# Altium PCB comparator_mezzanine.PcbDoc
Units mil, origin at the board's own origin, x right, y up, seen from the top; angles counter-clockwise.
Board outline 2200 x 2200 mil, 4 copper layers (Top Layer, Signal Layer 1, Signal Layer 2, Bottom Layer), stack 30.634 mil thick; 29 components, 55 nets, 244 pads, 27 vias.
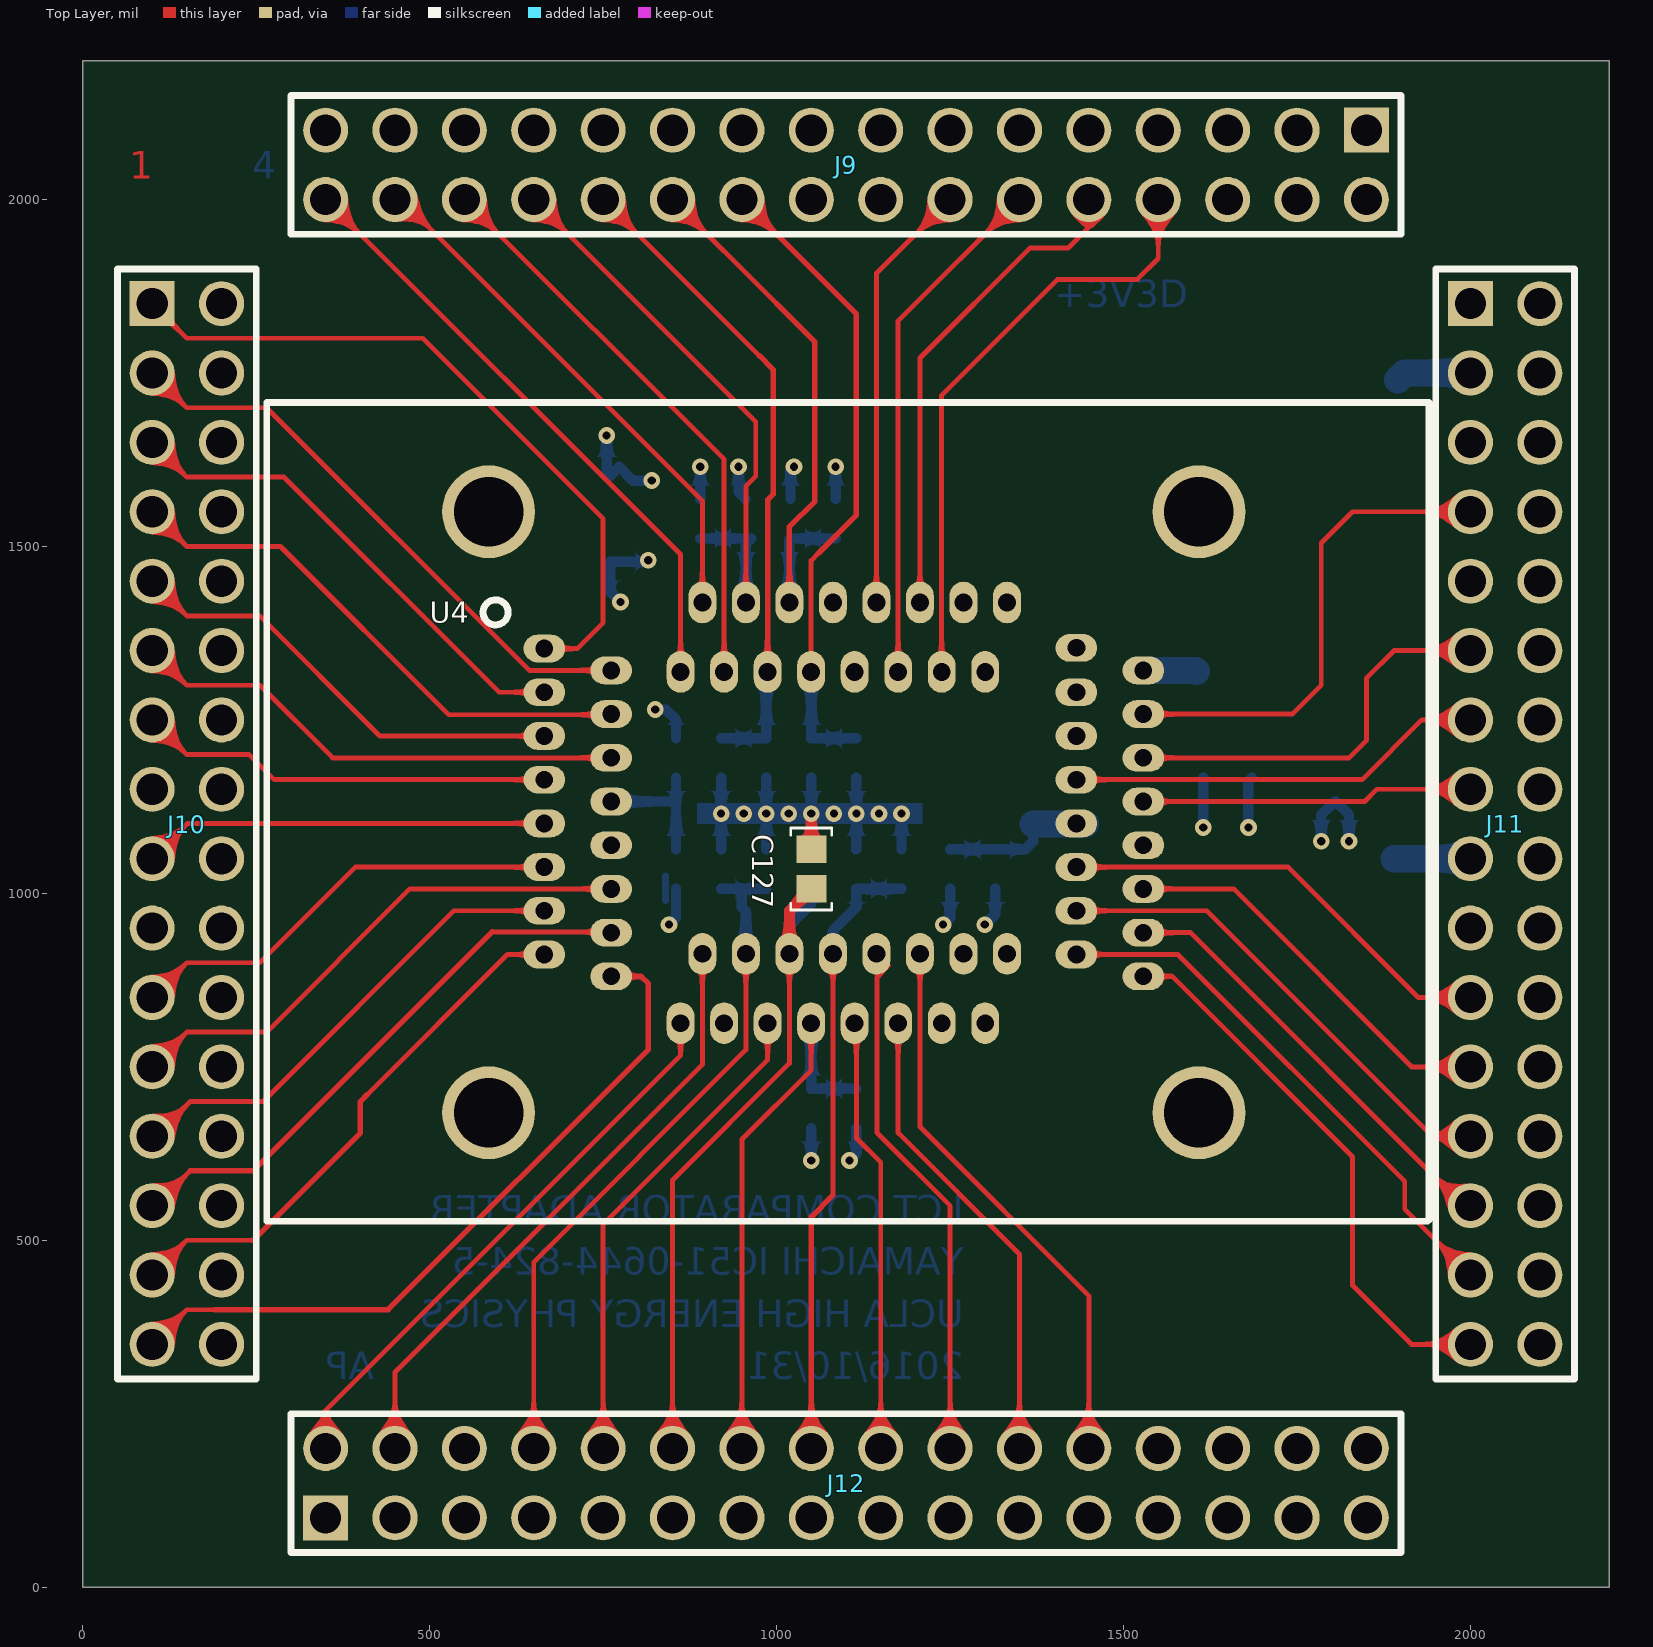
[diagram p0: Top Layer view]
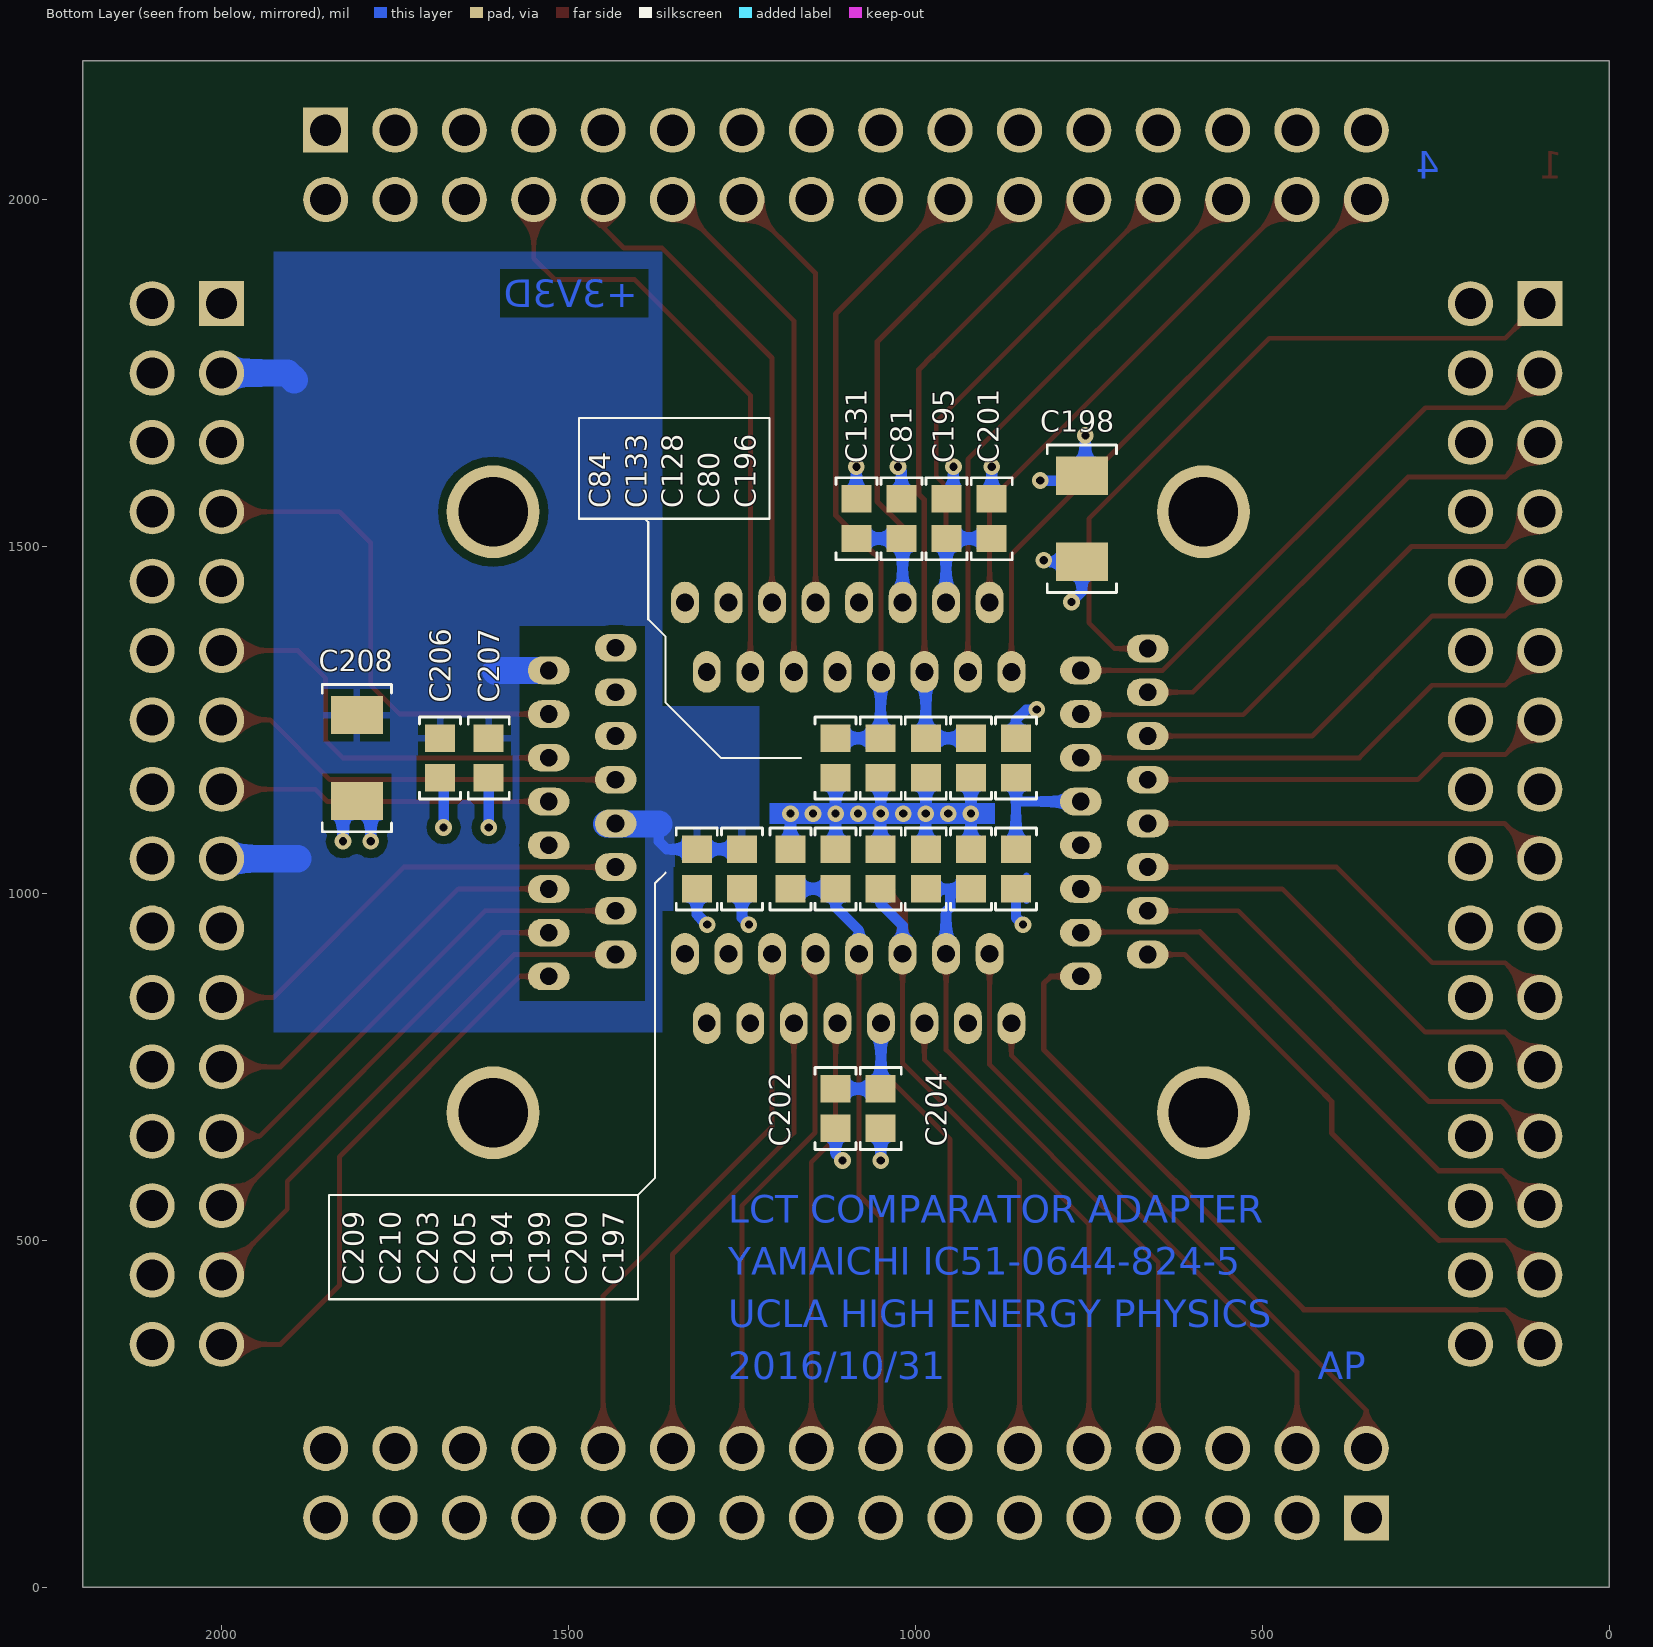
[diagram p1: Bottom Layer view, seen from below]
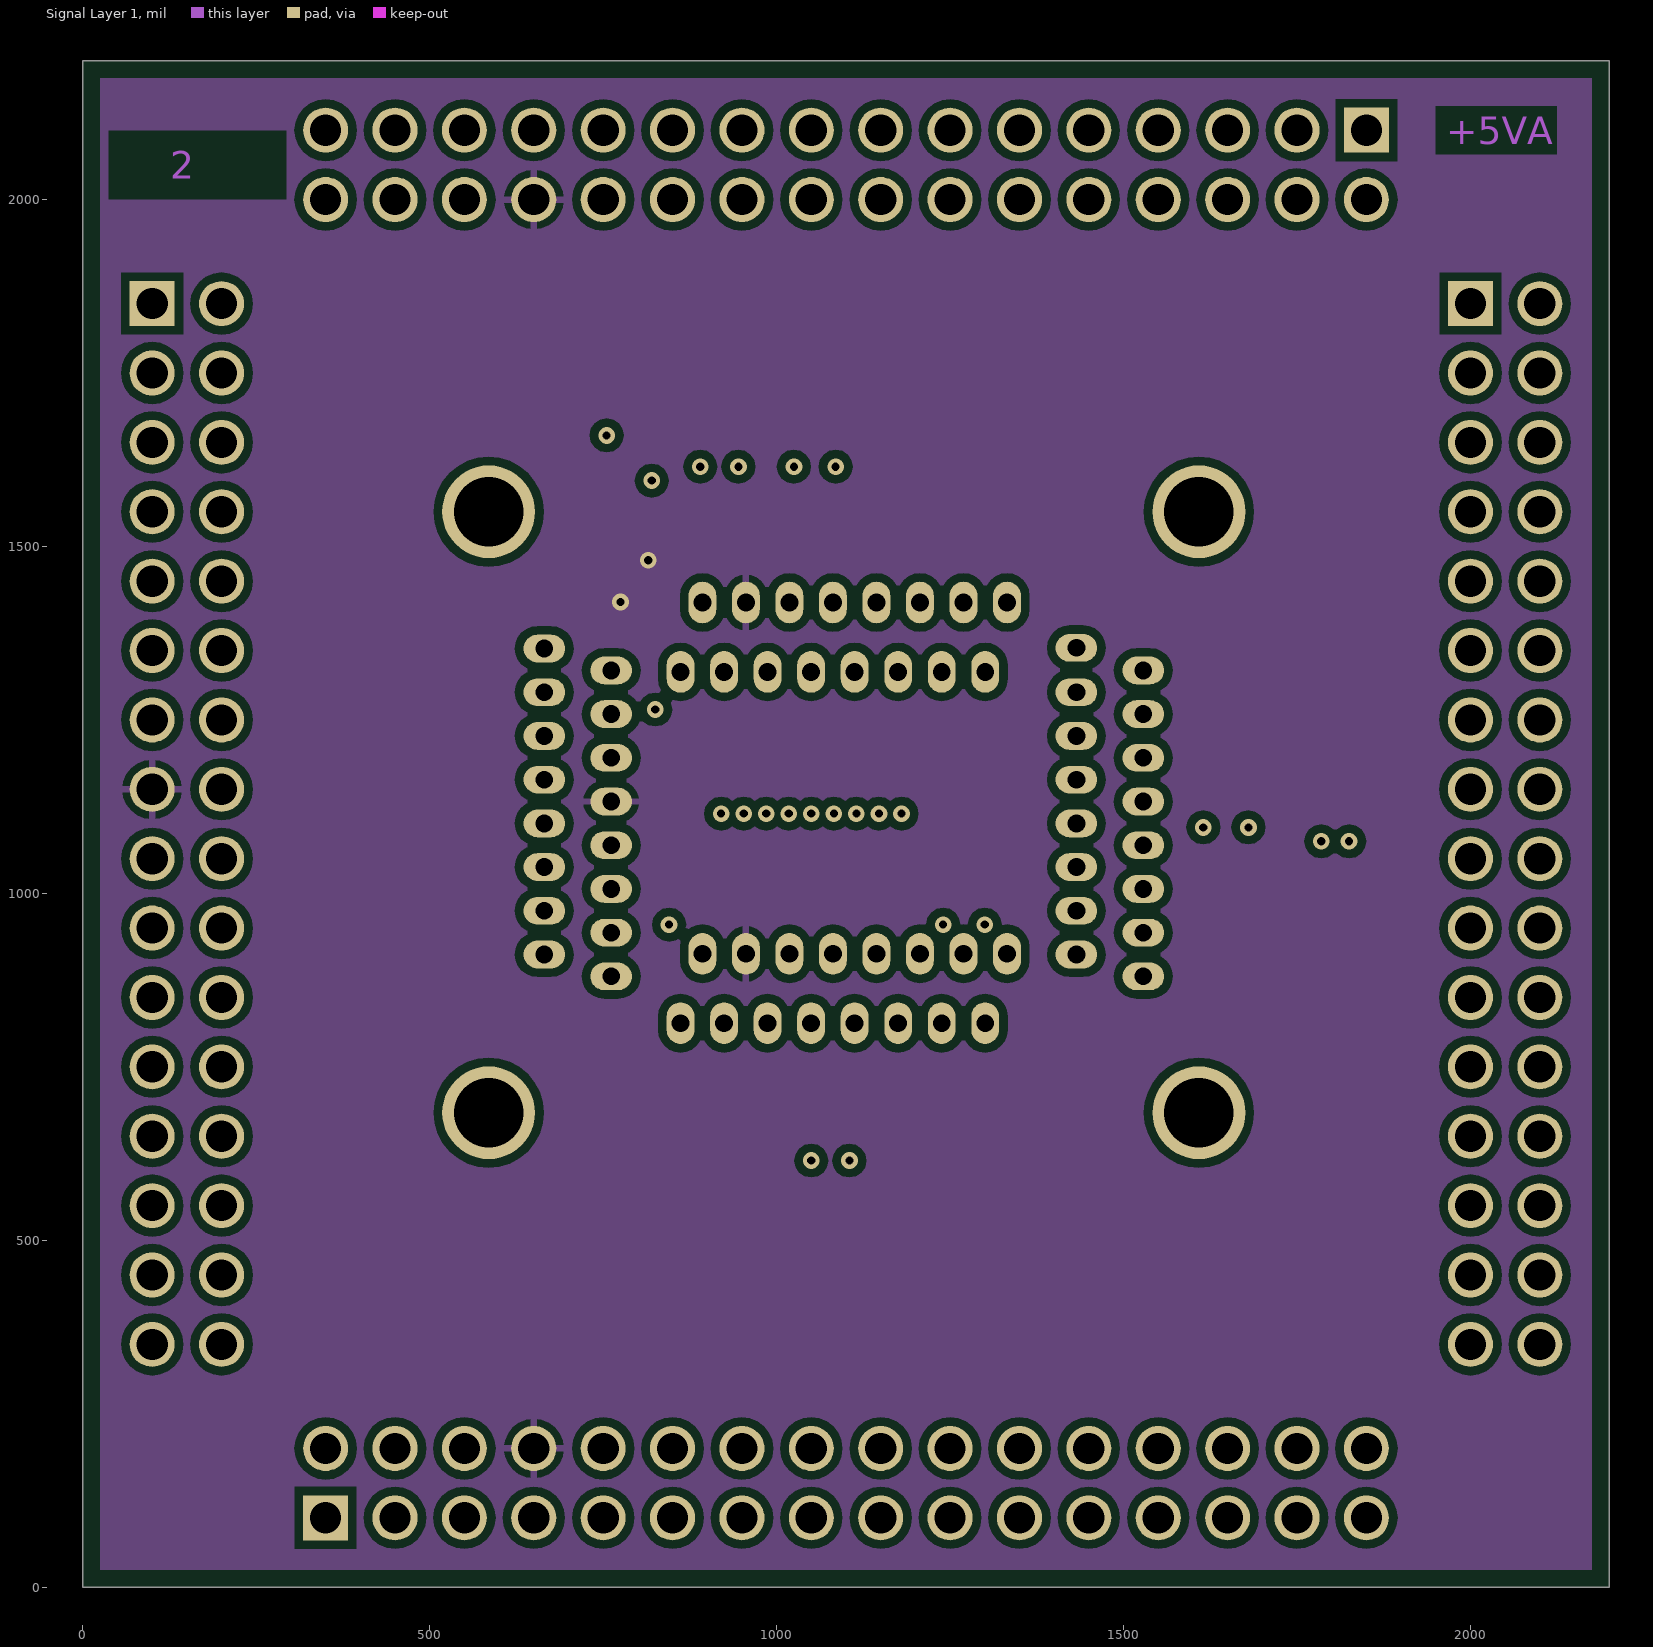
[diagram p2: Signal Layer 1]
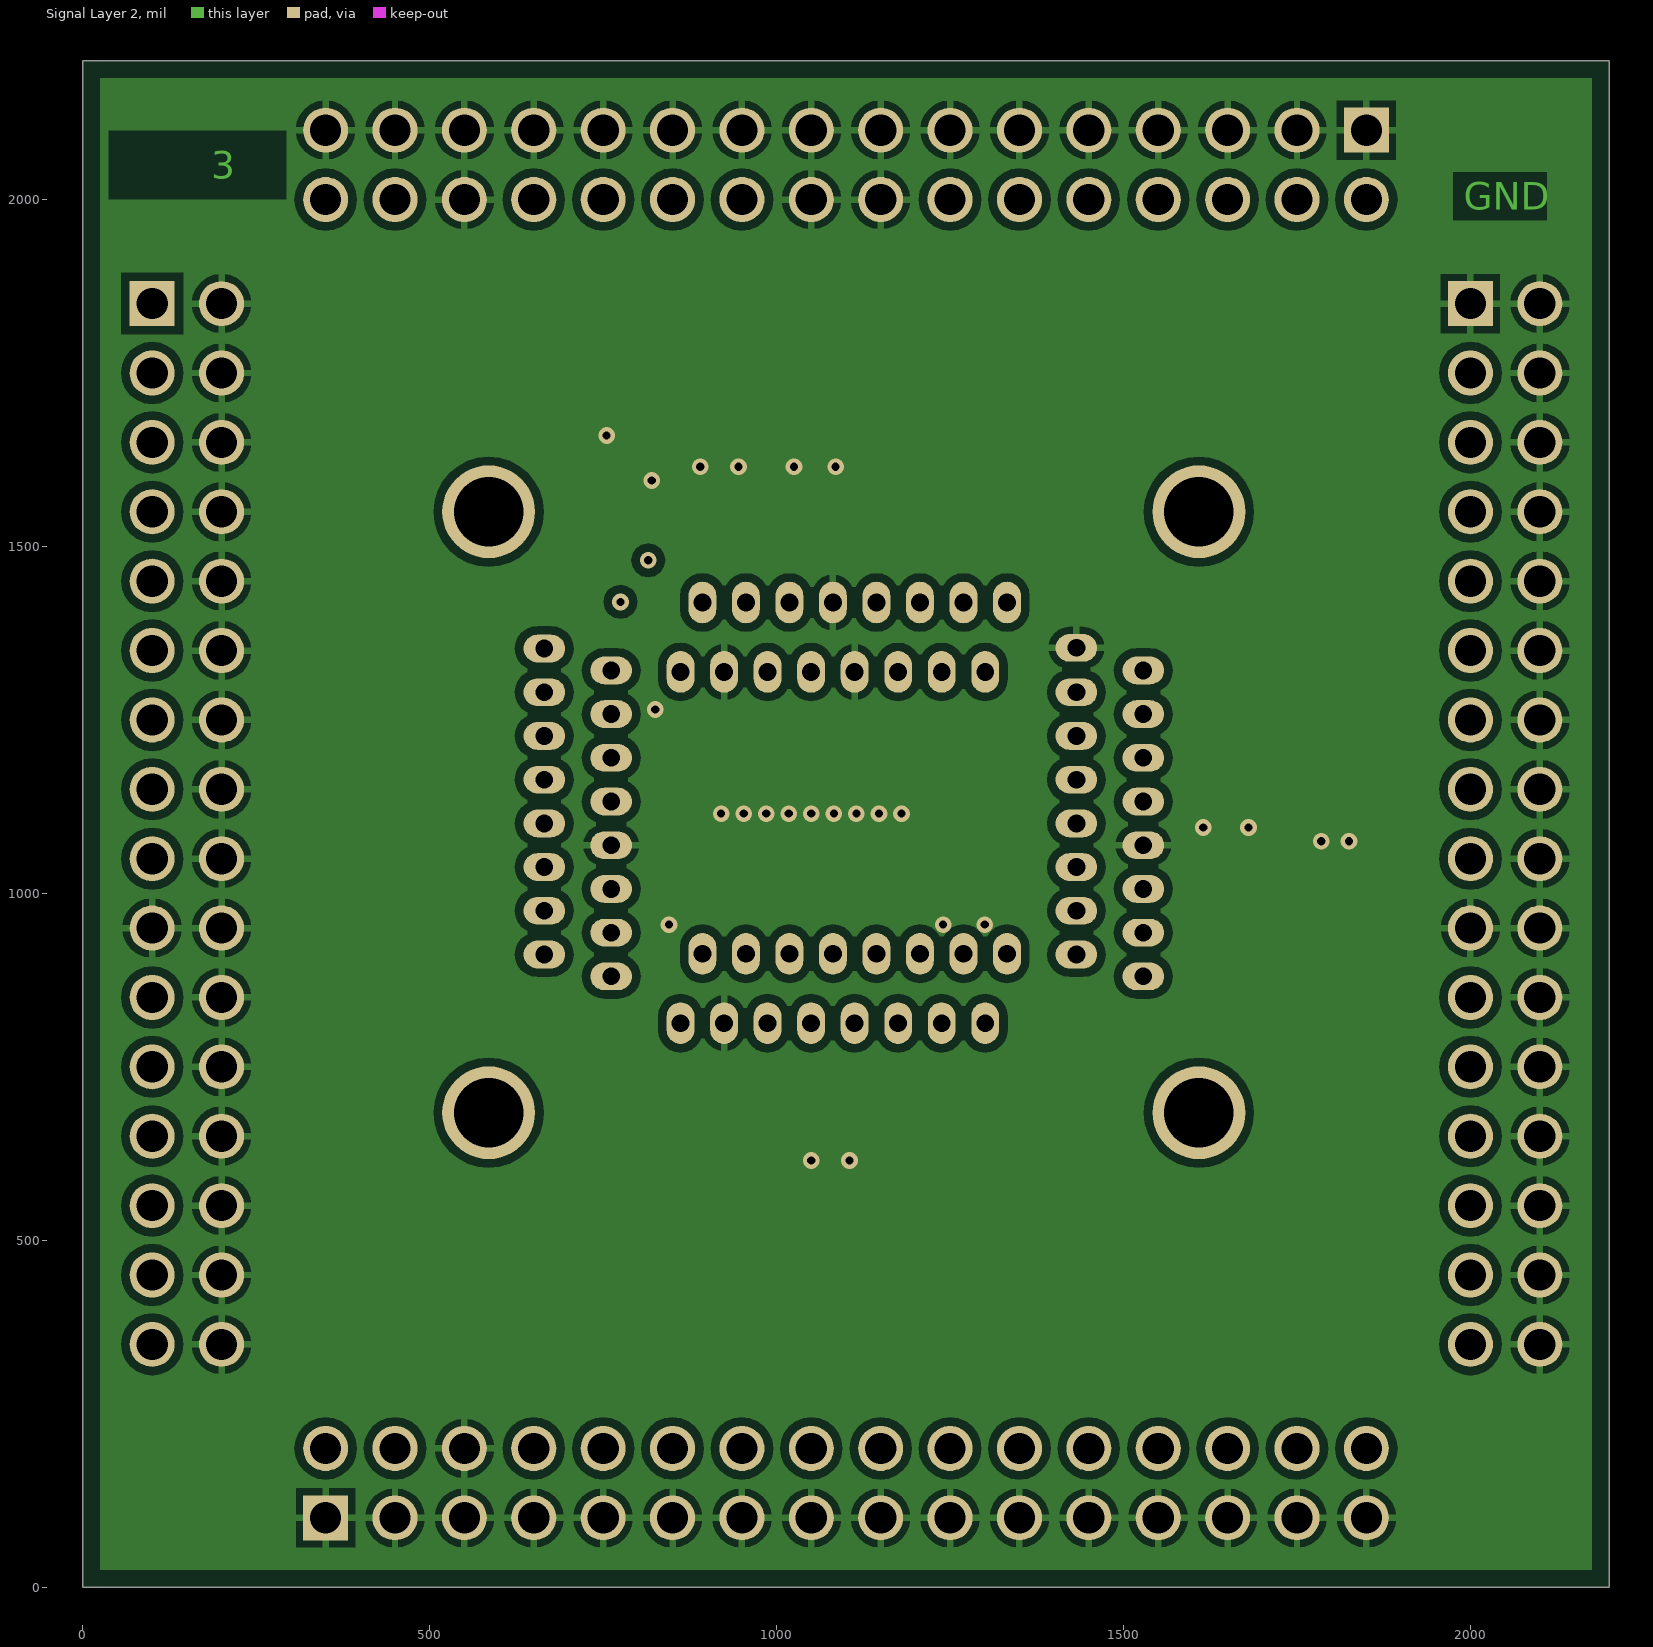
[diagram p3: Signal Layer 2]
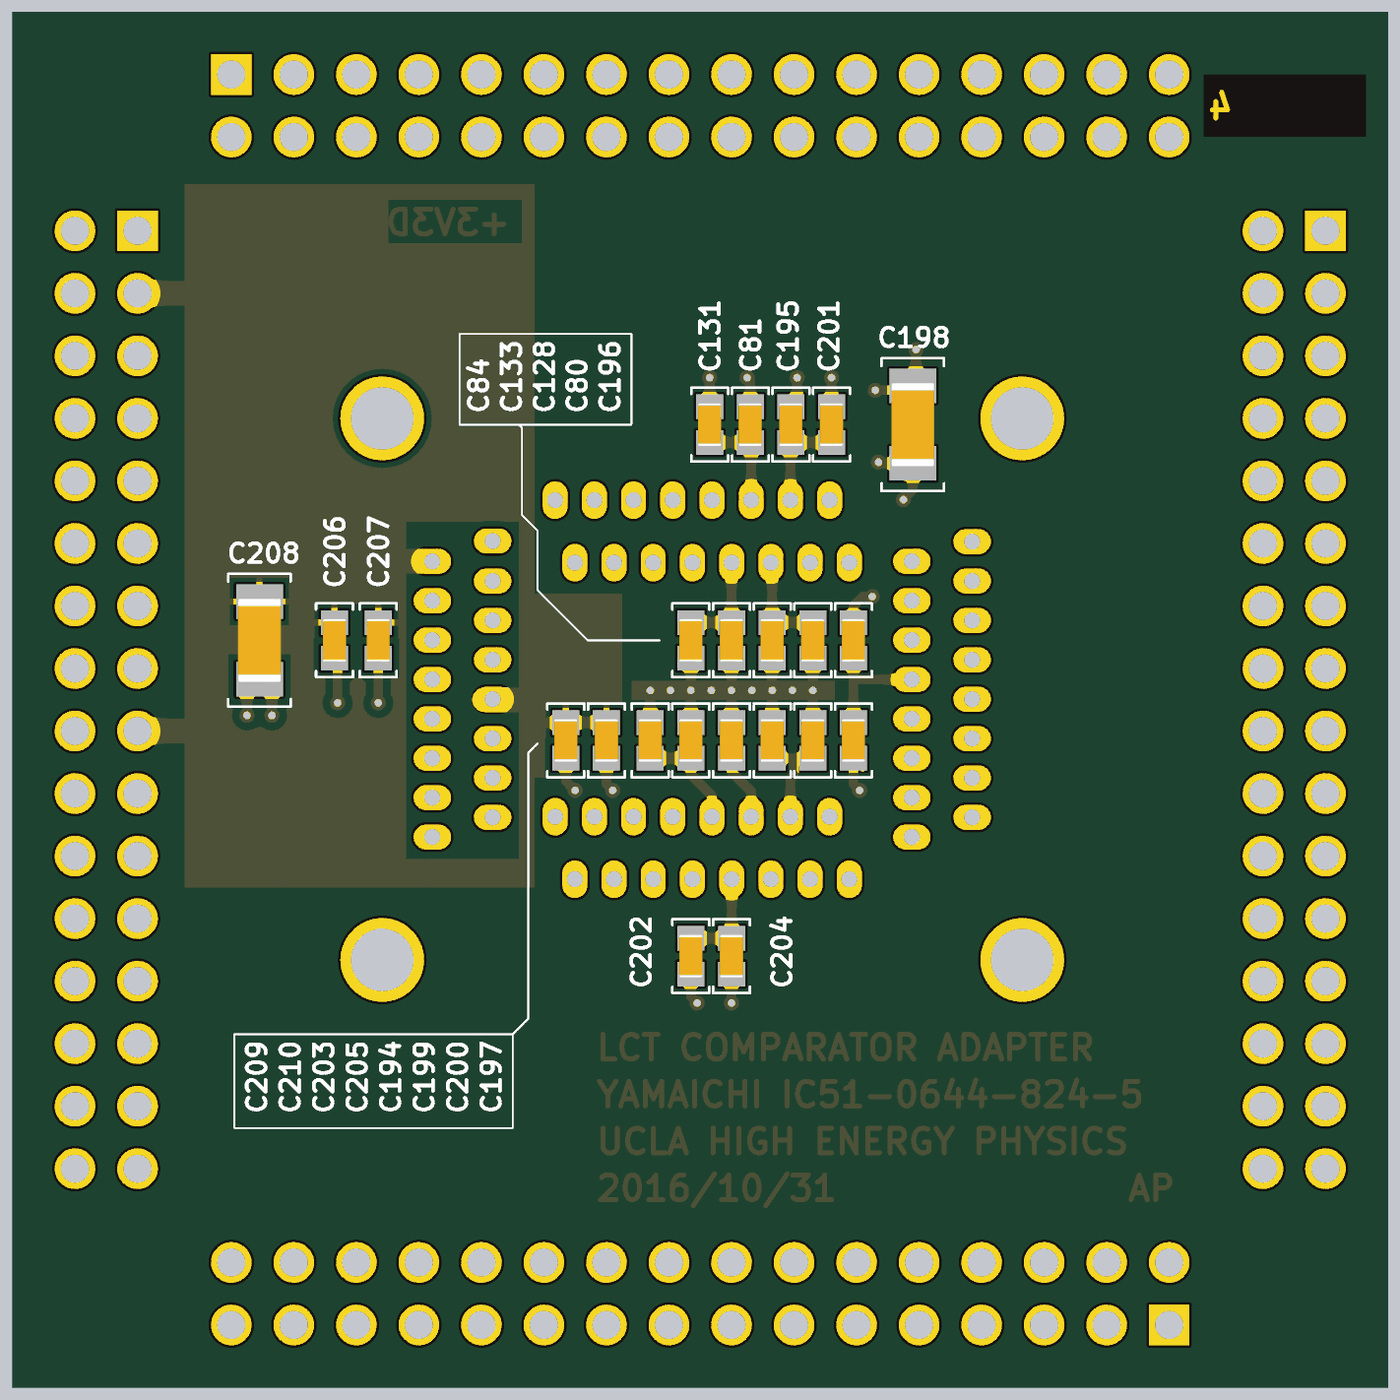
[diagram p4: 3D render of the assembled board from below, using the file's embedded part models]

## Layer stack, top to bottom
Top Solder: solder mask 0.4, Solder Resist, Dk 3.5
Top Layer: signal copper 1.4
Dielectric 1: core 10, FR-4, Dk 4.2
Signal Layer 1: signal copper 1.417
Dielectric 3: prepreg 5, Dk 4.2
Signal Layer 2: signal copper 1.417
Dielectric 2: core 10, Dk 4.2
Bottom Layer: signal copper 1.4
Bottom Solder: solder mask 0.4, Solder Resist, Dk 3.5

## Board outline
0,0 2200,0 2200,2200 0,2200

## Design rules (kind name [scope] priority, off if disabled: settings)
Clearance [All] p1: gap=7 except(12: Arc-Poly Track-Poly SMDPad-Poly THPad-Poly Via-Poly Fill-Poly Poly-Poly)
MinimumAnnularRing [All] p1: minimumring=6
MinimumSolderMaskSliver [All] p1: minsoldermaskwidth=9.45
PolygonConnect ViaConnect [IsVia] p1: connectstyle=Direct reliefconductorwidth=10 reliefentries=4 polygonreliefangle="90 Angle" airgapwidth=10
PolygonConnect [All] p2: connectstyle=Relief reliefconductorwidth=10 reliefentries=4 polygonreliefangle="90 Angle" airgapwidth=10
RoutingVias [All] p1: holewidth=10 width=20 viastyle="Through Hole" minholewidth=10 minwidth=20 maxholewidth=10 maxwidth=20
SilkToSolderMaskClearance [IsPad] p1: minsilkscreentomaskgap=5.91 clearancetoexposedcopper=TRUE
SolderMaskExpansion [All] p1: expansion=4
Width [All] p1: maxlimit=39.37 minlimit=7 preferedwidth=10 midlayer1_minwidth=10 midlayer2_minwidth=10 minimp=50.000000 maximp=50.000000 favimp=50.000000
28 further rules are at their usual default settings.

## Components (designator, comment, footprint, x,y, rotation, side; value= is the part's Value field where it differs from the comment)
C80 "1uF" C0603 920,1195 r90 bottom
C81 "1uF" C0603 1020,1540 r270 bottom
C84 "1uF" C0603 1115,1195 r90 bottom
C127 "1uF" C0603 1050,1035 r270 top
C128 "0.1uF" C0603 985,1195 r90 bottom
C131 "0.1uF" C0603 1085,1540 r270 bottom
C133 "0.1uF" C0603 1050,1195 r90 bottom
C194 "0.1uF" C0603 1050,1035 r270 bottom
C195 "1uF" C0603 955,1540 r270 bottom
C196 "1uF" C0603 855,1195 r270 bottom
C197 "1uF" C0603 855,1035 r90 bottom
C198 "10uF" c1206 760,1540 r90 bottom
C199 "0.1uF" C0603 985,1035 r270 bottom
C200 "0.1uF" C0603 920,1035 r270 bottom
C201 "0.1uF" C0603 890,1540 r270 bottom
C202 "1uF" C0603 1115,690 r90 bottom
C203 "1uF" C0603 1180,1035 r270 bottom
C204 "0.1uF" C0603 1050,690 r90 bottom
C205 "0.1uF" C0603 1115,1035 r270 bottom
C206 "1uF" C0603 1685,1195 r90 bottom
C207 "1uF" C0603 1615,1195 r90 bottom
C208 "10uF" c1206 1805,1195 r270 bottom
C209 "0.1uF" C0603 1315,1035 r90 bottom
C210 "0.1uF" C0603 1250,1035 r90 bottom
J9 "HEADER 16x02" "HEADER 16X02" 1850,2100 r270 top
J10 "HEADER 16x02" "HEADER 16X02" 100,1850 r0 top
J11 "HEADER 16x02" "HEADER 16X02" 2000,1850 r0 top
J12 "HEADER 16x02" "HEADER 16X02" 350,100 r90 top
U4 "UCLA/LCT_COMP" FPQ-64-0.8-10 585,1550 r0 top locked

## Footprints (in the part's own frame and the unit in brackets; to place one, negate y for a bottom-side part, rotate by r counter-clockwise, add the part's x,y. Pads: shape width x height; smd on the part's side, far side on the other; paste and mask are expansions set on the pad)
C0603 [mm] "Chip Capacitor, 2-Leads, Body 1.60x0.85mm, IPC Low Density"
  rect 1x1.1 smd: 1(-0.725,0) 2(0.725,0)
  silkscreen extent -1.5,-0.75 1.5,0.75, body extent -0.87,-0.48 0.87,0.48, height 0.55
c1206 [mm] "Chip Capacitor, 2-Leads, Body 3.27x1.60mm, IPC Low Density"
  rect 1.4x1.9 smd: 1(-1.575,0) 2(1.575,0)
  silkscreen extent -2.7,-1.27 2.7,1.27, body extent -1.7,-0.87 1.7,0.87, height 1.75
FPQ-64-0.8-10 [mil] "TQFP-64 Chip Socket"
  oval 60x40 hole 25.59: 1(80.12,-197.14) 2(176.57,-228.64) 3(80.12,-260.13) 4(176.57,-291.63) 5(80.12,-323.13) 6(176.57,-354.62) 7(80.12,-386.12) 8(176.57,-417.61) 9(80.12,-449.11) 10(176.57,-480.61) 11(80.12,-512.1) 12(176.57,-543.6) 13(80.12,-575.09) 14(176.57,-606.59) 15(80.12,-638.09) 16(176.57,-669.58) 33(943.5,-669.58) 34(847.05,-638.09) 35(943.5,-606.59) 36(847.05,-575.09) 37(943.5,-543.6) 38(847.05,-512.1) 39(943.5,-480.61) 40(847.05,-449.11) 41(943.5,-417.61) 42(847.05,-386.12) 43(943.5,-354.62) 44(847.05,-323.13) 45(943.5,-291.63) 46(847.05,-260.13) 47(943.5,-228.64) 48(847.05,-196.14)
  oval 40x60 hole 25.59: 17(276.57,-737.09) 18(308.07,-637.09) 19(339.29,-737.09) 20(370.78,-637.09) 21(402,-737.09) 22(433.49,-637.09) 23(464.71,-737.09) 24(496.2,-637.09) 25(527.42,-737.09) 26(558.91,-637.09) 27(590.13,-737.09) 28(621.62,-637.09) 29(652.84,-737.09) 30(684.34,-637.09) 31(715.55,-737.09) 32(747.05,-637.09) 49(747.05,-130.79) 50(715.55,-230.79) 51(684.34,-130.79) 52(652.84,-230.79) 53(621.62,-130.79) 54(590.13,-230.79) 55(558.91,-130.79) 56(527.42,-230.79) 57(496.2,-130.79) 58(464.71,-230.79) 59(433.49,-130.79) 60(402,-230.79) 61(370.78,-130.79) 62(339.29,-230.79) 63(308.07,-130.79) 64(276.57,-230.79)
  round 133.86 hole 100: ""(0,-866.14) ""(0,0) ""(1023.62,-866.14) ""(1023.62,0)
  silkscreen extent -320,-1023 1355,157
"HEADER 16X02" [mil]
  rect 65x65 hole 45: 1(0,0)
  round 65 hole 45: 2(100,0) 3(0,-100) 4(100,-100) 5(0,-200) 6(100,-200) 7(0,-300) 8(100,-300) 9(0,-400) 10(100,-400) 11(0,-500) 12(100,-500) 13(0,-600) 14(100,-600) 15(0,-700) 16(100,-700) 17(0,-800) 18(100,-800) 19(0,-900) 20(100,-900) 21(0,-1000) 22(100,-1000) 23(0,-1100) 24(100,-1100) 25(0,-1200) 26(100,-1200) 27(0,-1300) 28(100,-1300) 29(0,-1400) 30(100,-1400) 31(0,-1500) 32(100,-1500)
  silkscreen extent -50,-1550 150,50

## Part data
C80 C81 C84 C127 C195 C196 C197 C202 C203 C206 C207: library part Murata/GRM188R61E105KA12D, "CAP2, CER, 1.0uF, 10%, 25V, 0603"
C128 C131 C133 C194 C199 C200 C201 C204 C205 C209 C210: library part CAP/06035C104KAT2A, "CAP-CER, 2, 0.1uF, 10%, 50V, 0603, X7R"
C198 C208: library part CAP/GMK316F106ZL-T, "CAP-CER, 2, 10uF, 10%, 35V, 1206"
U4: "UCLA LCT Comparator"

## Via types
v1: diameter 24, hole 11.81, Top Layer to Bottom Layer, tented both sides, 27 vias

## Nets (pads, with @x,y where several pads share a name; then routed paths per layer and width w, separated by ;. In a path a pad name is that pad's centre, name@x,y a point inside that pad or via, vN(x,y) a via of type N, cw(c..) or ccw(c..) an arc to the next point about the centre after c; other vN are vias at no path point)
+3V3D: C206.2 C207.2 C208.1 C209.2 C210.2 J11.3 J11.17 U4.40 U4.47 | length 516.6
  Bottom Layer w15: C210.2 C209.2 1358.54,1063.54 1370,1075 1370,1085 1377.5,1092.5 ; J11.3@1995,1750 J11.3
  Bottom Layer w39.37: 1370,1100 U4.40@1445,1100 ; U4.47 1603.64,1321.36 1605,1320 ; 1890,1050 J11.17 ; 1895,1740 1905,1750 J11.3@1995,1750
+5VA: C195.2 C196.2 C197.2 C198.1 C199.2 C200.2 C201.2 J9.26 J10.15 J12.8 U4.8 U4.20 U4.61 | length 2208.2
  Top Layer w7: J12.8 650,468.57 955.78,774.35 U4.20 ; J9.26 970,1680 970,1601.01 955.78,1586.79 U4.61
  Bottom Layer w15: U4.8 852.61,1132.39 855,1130 ; v1(775,1420) 760,1435 C198.1 812.99,1477.99 v1(815,1480) ; C197.2 855,1130 ; C196.2 855,1130 ; C201.2 C195.2 963.54,1511.46 955.78,1503.7 U4.61 ; C200.2 955,1006.46 ; U4.20 955.78,974.22 950,980 950,1001.46 955,1006.46 ; C199.2 955,1006.46
COMPIN: J9.12 U4.54 | length 753.2
  Top Layer w7: U4.54 1175.13,1825.13 J9.12
COMPOUT: J12.18 U4.25 | length 628.5
  Top Layer w7: U4.25 1115,810.33 1115,647.42 1150,612.42 J12.18
DISTRIP0: J11.7 U4.45 | length 717.4
  Top Layer w7: U4.45 1743.37,1258.37 1785,1300 1785,1505 1830,1550 J11.7
  Top Layer w10: U4.45@1523.5,1258.37 U4.45
DISTRIP1: J11.11 U4.43 | length 588.3
  Top Layer w7: U4.43 1825.38,1195.38 1850,1220 1850,1310 1890,1350 J11.11
DISTRIP2: J11.13 U4.42 | length 603.7
  Top Layer w7: U4.42 1432.05,1164 1844,1164 1930,1250 J11.13
DISTRIP3: J11.15 U4.41 | length 478.8
  Top Layer w7: U4.41 1847.39,1132.39 1865,1150 J11.15
DISTRIP4: J11.21 U4.38 | length 645.8
  Top Layer w7: U4.38 1737.1,1037.9 1925,850 J11.21
DISTRIP5: J11.23 U4.37 | length 577.7
  Top Layer w7: U4.37 1658.6,1006.4 1915,750 J11.23
DISTRIP6: J11.25 U4.36 | length 702.5
  Top Layer w7: U4.36 1620.09,974.91 1945,650 J11.25
DISTRIP7: J11.27 U4.35 | length 634.5
  Top Layer w7: U4.35 1596.59,943.41 1990,550 J11.27
GND: C80.1 C81.1 C84.1 C127.1 C128.1 C131.1 C133.1 C194.1 C195.1 C196.1 C197.1 C198.2 C199.1 C200.1 C201.1 C202.1 C203.1 C204.1 C205.1 C206.1 C207.1 C208.2 C209.1 C210.1 J9.1 J9.3 J9.5 J9.7 J9.9 J9.11 J9.13 J9.15 J9.16 J9.17 J9.18 J9.19 J9.21 J9.23 J9.25 J9.27 J9.28 J9.29 J9.31 J10.2 J10.4 J10.6 J10.8 J10.10 J10.12 J10.14 J10.16 J10.18 J10.19 J10.20 J10.22 J10.24 J10.26 J10.28 J10.30 J10.32 J11.1 J11.2 J11.4 J11.6 J11.8 J11.10 J11.12 J11.14 J11.16 J11.18 J11.19 J11.20 J11.22 J11.24 J11.26 J11.28 J11.30 J11.32 J12.1 J12.3 J12.5 J12.6 J12.7 J12.9 J12.11 J12.13 J12.15 J12.17 J12.19 J12.21 J12.23 J12.25 J12.27 J12.29 J12.31 U4.10 U4.19 U4.39 U4.48 U4.56 U4.57 U4.62 | length 2317.3
  Top Layer w7: J9.28 924.29,1625.71 U4.62
  Top Layer w15: C127.1 v1(1050,1115)
  Bottom Layer w10: C197.1@840,990 C197.1@840,1025
  Bottom Layer w15: v1(755,1660) 755,1607.01 C198.2 772.99,1615 792.99,1595 v1(820,1595) ; v1(825,1265) 840,1265 855,1250 C196.1 ; v1(845,955) 855,965 C197.1 ; C201.1 v1(890,1615) ; C200.1 v1(920,1115) C80.1 ; v1(945,1615) 945,1578.54 C195.1 ; C199.1 v1(985,1115) C128.1 ; C81.1 1020,1610 v1(1025,1615) ; v1(1050,615) C204.1 ; C194.1 v1(1050,1115) C133.1 ; C131.1 v1(1085,1615) ; v1(1105,615) 1115,625 C202.1 ; C205.1 v1(1115,1115) C84.1 ; C203.1 v1(1180,1115) ; v1(1240,955) 1250,965 C210.1 ; v1(1300,955) 1315,970 C209.1 ; v1(1615,1095) C207.1 ; v1(1680,1095) 1680,1161.46 C206.1 ; v1(1785,1075) 1785,1112.99 C208.2 1825,1112.99 v1(1825,1075)
  other v1: 952.5,1115 1017.5,1115 1082.5,1115 1147.5,1115
IAMP: C202.2 C204.2 J12.14 U4.23 | length 813.7
  Top Layer w7: J12.14 950,645.29 1049.71,745 U4.23
  Bottom Layer w15: U4.23 1049.71,718.84 C204.2 C202.2
IBIAS: C81.2 C131.2 J9.22 U4.59 | length 838.7
  Top Layer w7: J9.22 1000.28,1849.72
  Top Layer w7.87: 1000.28,1849.72 1055,1795 1055,1565 1018.49,1528.49 U4.59
  Bottom Layer w15: U4.59 1018.49,1509.95 C81.2 C131.2
IFAMP: C127.2 C194.2 J12.12 U4.22 | length 995.9
  Top Layer w7: J12.12 850,586.51 1018.49,755 U4.22
  Top Layer w15: U4.22 1018.49,974.95 C127.2
  Bottom Layer w15: U4.22 1018.49,953.49 1050,985 C194.2
IN0: J9.30 U4.63 | length 769.6
  Top Layer w7: J9.30 458.99,2000 893.07,1565.92 U4.63
IN1: J9.32 U4.64 | length 892.7
  Top Layer w7: J9.32 861.57,1488.43 U4.64
IN2: J10.1 U4.1 | length 1028.7
  Top Layer w7: J10.1 150,1800 490,1800 750,1540 750,1390 712.86,1352.86 U4.1
IN3: J10.3 U4.2 | length 839.1
  Top Layer w7: J10.3 150,1700 264.84,1700 643.48,1321.36 U4.2
IN4: J10.5 U4.3 | length 714.3
  Top Layer w7: J10.5 150,1600 290,1600 600.13,1289.87 U4.3
IN5: J10.7 U4.4 | length 789.3
  Top Layer w7: J10.7 150,1500 285,1500 527.63,1257.37 745.83,1257.37 753.2,1250 U4.4
IN6: J10.9 U4.5 | length 657.5
  Top Layer w7: J10.9 150,1400 255,1400 428.13,1226.87 U4.5
IN7: J10.11 U4.6 | length 725.6
  Top Layer w7: J10.11 150,1300 255.38,1300 360,1195.38 U4.6
IN8: J10.13 U4.7 | length 600.8
  Top Layer w7: J10.13 150,1200 240,1200 276.12,1163.88 U4.7
IN9: J10.17 U4.9 | length 586.2
  Top Layer w7: J10.17 150.89,1100.89 U4.9
IN10: J10.21 U4.11 | length 642.9
  Top Layer w7: J10.21 150,900 255,900 392.9,1037.9 U4.11
IN11: J10.23 U4.12 | length 767.8
  Top Layer w7: J10.23 150,800 265,800 471.4,1006.4 U4.12
IN12: J10.25 U4.13 | length 699.7
  Top Layer w7: J10.25 105,650 155,700 260,700 534.91,974.91 U4.13
IN13: J10.27 U4.14 | length 834.1
  Top Layer w7: J10.27 105,550 155,600 ; 590,944.41 739.39,944.41 749.98,955 U4.14
  Top Layer w7.87: 155,600 245.59,600 590,944.41
IN14: J10.29 U4.15 | length 782.8
  Top Layer w7: J10.29 150,500 245,500 ; 410,710 611.91,911.91 U4.15
  Top Layer w7.87: 245,500 400,655 400,700 410,710
IN15: J10.31 U4.16 | length 1043.8
  Top Layer w7: J10.31 150,400 190,400
  Top Layer w7.87: 190,400 440,400 815,775 815,870 804.58,880.42 U4.16
IN16: J12.2 U4.17 | length 824.8
  Top Layer w7: J12.2 350,255 861.57,766.57 U4.17
IN17: J12.4 U4.18 | length 896.4
  Top Layer w7: J12.4 450,310 893.07,753.07 U4.18
IOFF: C84.2 C133.2 J9.20 U4.58 | length 937
  Top Layer w7: U4.58 1049.71,1479.71 1060,1490
  Top Layer w7.87: J9.20 1115,1835 1115,1545 1060,1490
  Bottom Layer w15: U4.58 1050,1318.92 C133.2 C84.2
LCT_CLK: J9.8 U4.52 | length 877.5
  Top Layer w7: U4.52 1237.84,1717.84 1405,1885 1520,1885 1550,1915 J9.8
LCT_RST: J9.10 U4.53 | length 713.8
  Top Layer w7: U4.53 1206.62,1771.62 1365,1930 1420,1930 1450,1960 J9.10
NC1: J12.10 U4.21 | length 711.1
  Top Layer w7: J12.10 750,523 987,760 U4.21
NC2: U4.29
NC3: U4.30
NC4: U4.31
NC5: U4.32
NC6: U4.44
NC7: U4.46
NC8: U4.49
NC9: U4.50
NC10: U4.51
OUT0001: J9.14 U4.55 | length 624.7
  Top Layer w7: U4.55 1143.91,1893.91 J9.14
PKMODE0: J11.29 U4.34 | length 782.8
  Top Layer w7: U4.34 1578.29,911.91 1905.2,585 1905.2,544.8 J11.29
PKMODE1: J11.31 U4.33 | length 799.8
  Top Layer w7: U4.33 1570,880.42 1830,620.42 1830,435 1915,350 J11.31
PKTIME0: J12.20 U4.26 | length 770.5
  Top Layer w7: U4.26 1161.13,895.7 1144.63,879.2 1144.63,655 1250,549.63 J12.20
PKTIME1: J12.22 U4.27 | length 685.3
  Top Layer w7: U4.27 1175.13,654.87 1350,480 J12.22
PKTIME2: J12.24 U4.28 | length 813.7
  Top Layer w7: U4.28 1206.62,663.38 1450,420 J12.24
VREF: C203.2 C205.2 J12.16 U4.24 | length 898.4
  Top Layer w7: 1081.2,565 U4.24
  Top Layer w7.87: J12.16 1050,533.8 1081.2,565
  Bottom Layer w15: U4.24 1081.2,946.2 1115,980 C205.2 C203.2
VTHRESH: C80.2 C128.2 J9.24 U4.60 | length 947.1
  Top Layer w7: J9.24 975,1775
  Top Layer w7.87: 975,1775 995,1755 995,1575 987,1567 U4.60
  Bottom Layer w15: C80.2 C128.2 985,1317.22 U4.60
pads on no net: J9.2 J9.4 J9.6 J11.5 J11.9 J12.26 J12.28 J12.30 J12.32 U4.

## Polygon pours and split planes (outlines as drawn)
+3V3D on Bottom Layer "+3V3D_L04_P002" (solid, remove dead copper, pour order 2): 1225,800 1925,800 1925,1925 1365,1925 1365,1455 1225,1455
+5VA on Signal Layer 1 "+5VA_L02_P000" (solid, remove dead copper, pour order 0): 25,25 2175,25 2175,2175 25,2175
GND on Signal Layer 2 "GND_L03_P004" (solid, remove dead copper, pour order 4): 25,25 2175,25 2175,2175 25,2175

## Other copper
Top Layer:
  pour cut-out: 37.36,2098.9 37.36,2000.47 293.27,2000.47 293.27,2098.9
  text "1" at 66.89,2030 h39.37
Signal Layer 1:
  pour cut-out: 37.36,2098.9 37.36,2000.47 293.27,2000.47 293.27,2098.9
  text "+5VA" at 1965,2080 h39.37
  text "2" at 125.94,2030 h39.37
Signal Layer 2:
  pour cut-out: 37.36,2098.9 37.36,2000.47 293.27,2000.47 293.27,2098.9
  text "3" at 185,2030 h39.37
  text "GND" at 1990,1985 h39.37
Bottom Layer:
  rectangle net GND: 885,1100 1210,1130
  pour cut-out: 1365,975 1365,772.43 830,772.43 830,975
  pour cut-out: 1365,1457.57 1365,1270 830,1270 830,1457.57
  pour cut-out: 795,855 619.85,855 619.85,1385 795,1385
  pour cut-out: 1570.25,845 1390,845 1390,1385 1570.25,1385
  pour cut-out: 37.36,2098.9 37.36,2000.47 293.27,2000.47 293.27,2098.9
  text "4" at 244.06,2030 h39.37
  text "+3V3D" at 1400,1845 h39.37
  text "LCT COMPARATOR ADAPTER" at 1270,525 h39.37
  text "YAMAICHI IC51-0644-824-5" at 1270,450 h39.37
  text "UCLA HIGH ENERGY PHYSICS" at 1270,375 h39.37
  text "AP" at 420,300 h39.37
  text "2016/10/31" at 1270,300 h39.37

## Silkscreen, mask and mechanical layers (free items; w line width, h text height)
Top Overlay:
  circle w10: c595,1405 r18.03
Bottom Overlay:
  lines w3: 1165,1195 1280,1195 1360,1275 1360,1370 1385,1395 1385,1405 1385,1535 1390,1540 ; 1360,1030 1375,1015 1375,960 1375,845 1375,590 1400,565 ; 1400,565 1845,565 1845,415 1400,415 1400,565 ; 1210,1540 1210,1685 1485,1685 1485,1540 1210,1540
Top Solder:
  rectangle: 35,1995 295,2100
Bottom Solder:
  rectangle: 35,2000 295,2100
Mechanical 1:
  the board outline again, w3.94